# Altium PCB NEW_PCB.pcbdoc
Units mil, origin at the board's own origin, x right, y up, seen from the top; angles counter-clockwise.
Board outline 42633.03 x 29914.43 mil, 2 copper layers (Top Layer, Bottom Layer); 19 components, 4 nets, 160 pads, 0 vias.
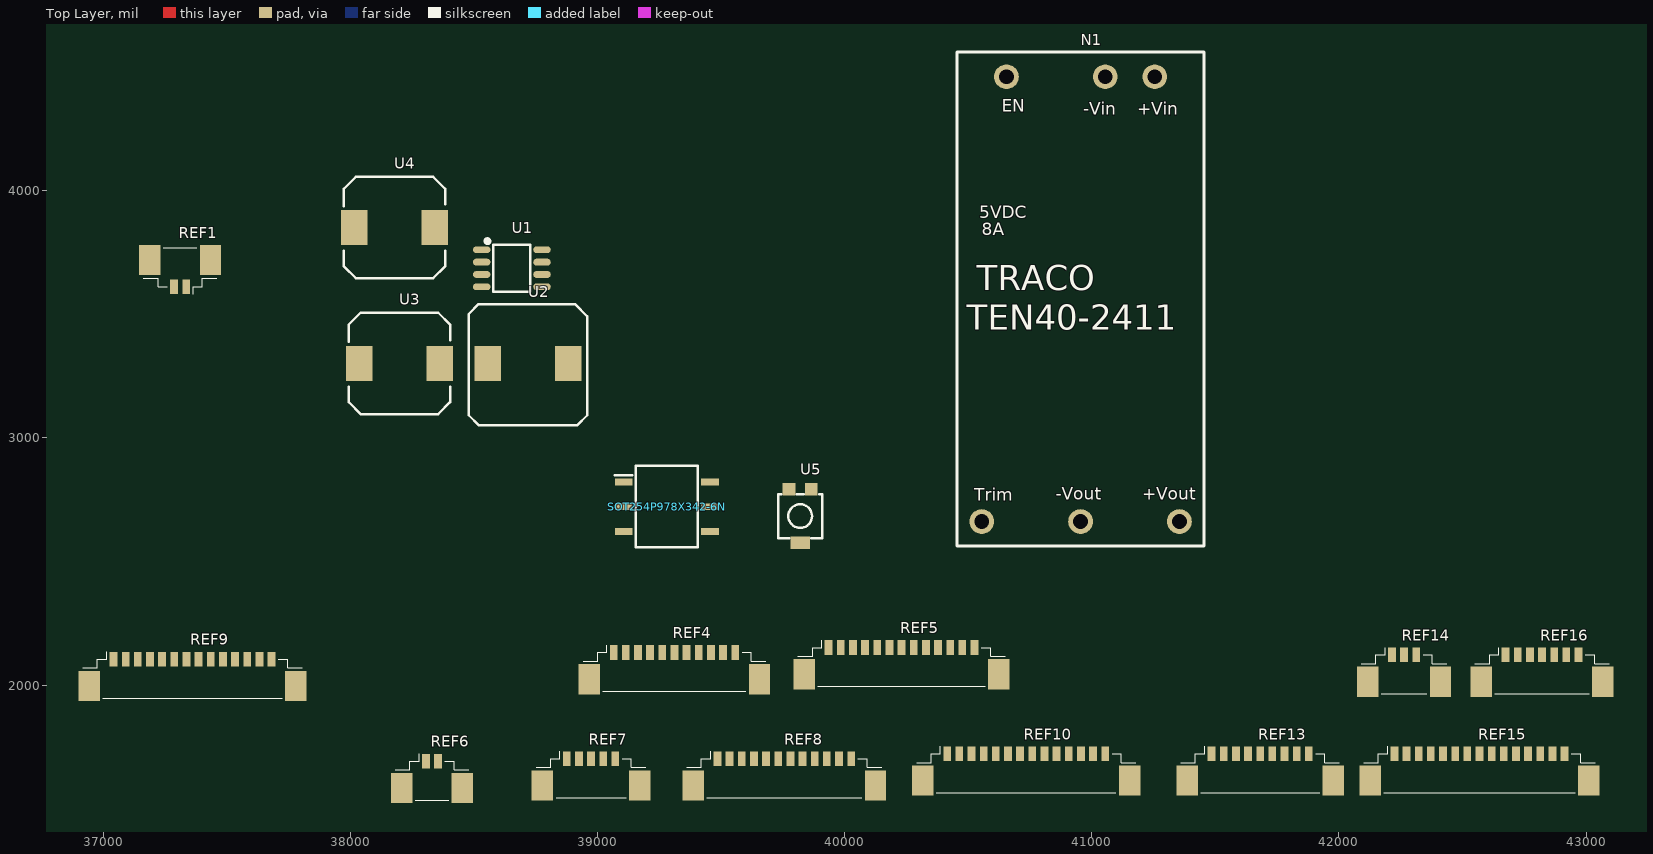
[diagram p0: Top Layer view]
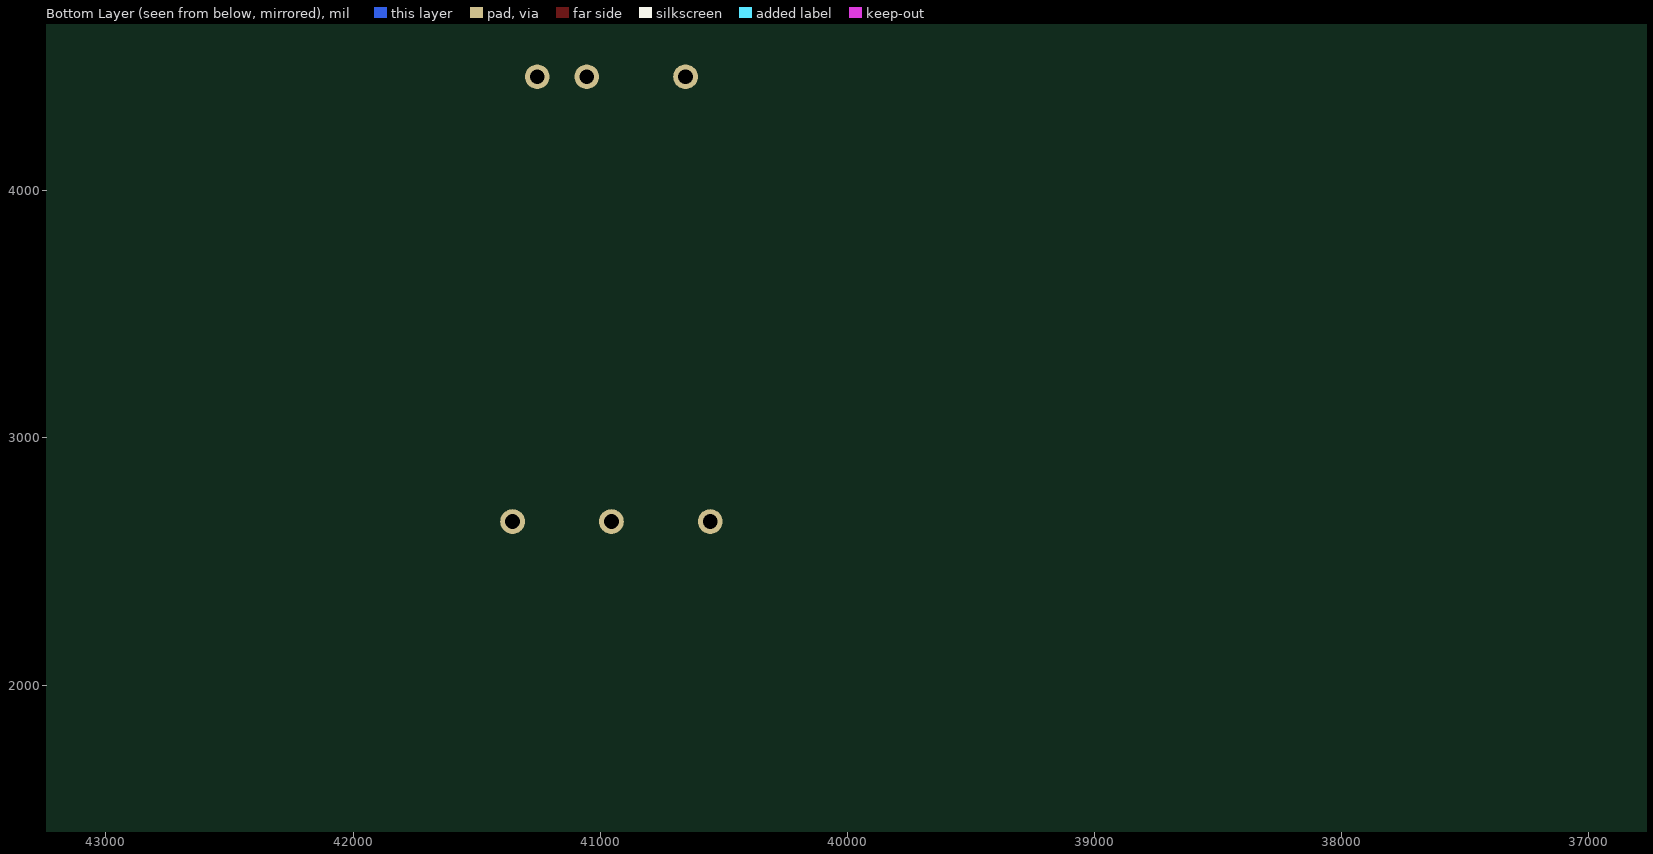
[diagram p1: Bottom Layer view, seen from below]

## Layer stack, top to bottom
Top Solder: solder mask 0.4, Solder Resist, Dk 3.5
Top Layer: signal copper 1.4
Dielectric1: dielectric 12.6, FR-4, Dk 4.8
Bottom Layer: signal copper 1.4
Bottom Solder: solder mask 0.4, Solder Resist, Dk 3.5

## Board outline
43633.03,1000 1000,1000 1000,30914.43 43633.03,30914.43

## Design rules (kind name [scope] priority, off if disabled: settings)
Clearance [All] p1: gap=10
PolygonConnect [All] p1: connectstyle=Relief reliefconductorwidth=10 reliefentries=4 polygonreliefangle="90 Angle" airgapwidth=10
RoutingVias [All] p1: holewidth=28 width=50 viastyle="Through Hole" minholewidth=28 minwidth=50 maxholewidth=28 maxwidth=50
SolderMaskExpansion [All] p1: expansion=4
Width [All] p1: maxlimit=10 minlimit=10 preferedwidth=10
29 further rules are at their usual default settings.

## Components (designator, comment, footprint, x,y, rotation, side; value= is the part's Value field where it differs from the comment)
N1 "TRACO TEN40" "TRACO TEN40" 40954.37,3561.93 r0 top
REF1 "53398-0271" 53398-0271 37334.37,3611.93 r0 top
REF4 "MOLEX_PICOBLADE_53398-1171_11X1.25MM_STRAIGHT" MOLEX_PICOBLADE_53398-1171_11X1.25MM_STRAIGHT 39064.37,2131.93 r0 top
REF5 "MOLEX_PICOBLADE_53398-1371_13X1.25MM_STRAIGHT" MOLEX_PICOBLADE_53398-1371_13X1.25MM_STRAIGHT 39934.37,2151.93 r0 top
REF6 "MOLEX_PICOBLADE_53398-0271_02X1.25MM_STRAIGHT" MOLEX_PICOBLADE_53398-0271_02X1.25MM_STRAIGHT 38304.37,1691.93 r0 top
REF7 "MOLEX_PICOBLADE_53398-0571_05X1.25MM_STRAIGHT" MOLEX_PICOBLADE_53398-0571_05X1.25MM_STRAIGHT 38874.37,1701.93 r0 top
REF8 "MOLEX_PICOBLADE_53398-1271_12X1.25MM_STRAIGHT" MOLEX_PICOBLADE_53398-1271_12X1.25MM_STRAIGHT 39484.37,1701.93 r0 top
REF9 "MOLEX_PICOBLADE_53398-1471_14X1.25MM_STRAIGHT" MOLEX_PICOBLADE_53398-1471_14X1.25MM_STRAIGHT 37040,2105 r0 top
REF10 "MOLEX_PICOBLADE_53398-1471_14X1.25MM_STRAIGHT" MOLEX_PICOBLADE_53398-1471_14X1.25MM_STRAIGHT 40414.37,1721.93 r0 top
REF13 "MOLEX_PICOBLADE_53398-0971_09X1.25MM_STRAIGHT" MOLEX_PICOBLADE_53398-0971_09X1.25MM_STRAIGHT 41484.37,1721.93 r0 top
REF14 "MOLEX_PICOBLADE_53398-0371_03X1.25MM_STRAIGHT" MOLEX_PICOBLADE_53398-0371_03X1.25MM_STRAIGHT 42214.37,2121.93 r0 top
REF15 "MOLEX_PICOBLADE_53398-1571_15X1.25MM_STRAIGHT" MOLEX_PICOBLADE_53398-1571_15X1.25MM_STRAIGHT 42224.37,1721.93 r0 top
REF16 "MOLEX_PICOBLADE_53398-0771_07X1.25MM_STRAIGHT" MOLEX_PICOBLADE_53398-0771_07X1.25MM_STRAIGHT 42674.37,2121.93 r0 top
SOT254P978X342-6N "SOT254P978X342-6N" SOT254P978X342-6N 35284.37,5721.93 r0 top
U1 "SOP-8_150MIL" SOP-8_150MIL 38754.37,3611.93 r0 top
U2 "B82464G4472M" B82464G4472M 38714.37,3301.93 r0 top
U3 "B82464" ? 38194.37,3301.93 r0 top
U4 "B82464" ? 38174.37,3851.93 r0 top
U5 "TRIMMER_3314G" TRIMMER_3314G 39824.37,2681.93 r0 top

## Footprints (in the part's own frame and the unit in brackets; to place one, negate y for a bottom-side part, rotate by r counter-clockwise, add the part's x,y. Pads: shape width x height; smd on the part's side, far side on the other; paste and mask are expansions set on the pad)
53398-0271 [mm]
  rect 0.8x1.5 smd: 1(0,0) 2(-1.25,0)
  rect 2.2x3.1 smd: 3(2.5,2.75) 4(-3.75,2.75)
  silkscreen extent -4.4,-0.75 3.15,4
B82464G4472M [mm]
  rect 2.7x3.6 smd: 1(-4.064,0) 2(4.236,-0.009)
  silkscreen extent -6.01,-6.35 6.18,6.1
MOLEX_PICOBLADE_53398-0271_02X1.25MM_STRAIGHT [mm]
  rect 0.8x1.5 smd: 1(0,0) 2(1.25,0)
  rect 2.2x3.1 smd: ""(-2.5,-2.75) ""(3.75,-2.75)
  silkscreen extent -3.15,-4 4.4,0.75
MOLEX_PICOBLADE_53398-0371_03X1.25MM_STRAIGHT [mm]
  rect 0.8x1.5 smd: 1(0,0) 2(1.25,0) 3(2.5,0)
  rect 2.2x3.1 smd: ""(-2.5,-2.75) ""(5,-2.75)
  silkscreen extent -3.15,-4 5.65,0.75
MOLEX_PICOBLADE_53398-0571_05X1.25MM_STRAIGHT [mm]
  rect 0.8x1.5 smd: 1(0,0) 2(1.25,0) 3(2.5,0) 4(3.75,0) 5(5,0)
  rect 2.2x3.1 smd: ""(-2.5,-2.75) ""(7.5,-2.75)
  silkscreen extent -3.15,-4 8.15,0.75
MOLEX_PICOBLADE_53398-0771_07X1.25MM_STRAIGHT [mm]
  rect 0.8x1.5 smd: 1(0,0) 2(1.25,0) 3(2.5,0) 4(3.75,0) 5(5,0) 6(6.25,0) 7(7.5,0)
  rect 2.2x3.1 smd: ""(-2.5,-2.75) ""(10,-2.75)
  silkscreen extent -3.15,-4 10.65,0.75
MOLEX_PICOBLADE_53398-0971_09X1.25MM_STRAIGHT [mm]
  rect 0.8x1.5 smd: 1(0,0) 2(1.25,0) 3(2.5,0) 4(3.75,0) 5(5,0) 6(6.25,0) 7(7.5,0) 8(8.75,0) 9(10,0)
  rect 2.2x3.1 smd: ""(-2.5,-2.75) ""(12.5,-2.75)
  silkscreen extent -3.15,-4 13.15,0.75
MOLEX_PICOBLADE_53398-1171_11X1.25MM_STRAIGHT [mm]
  rect 0.8x1.5 smd: 1(0,0) 2(1.25,0) 3(2.5,0) 4(3.75,0) 5(5,0) 6(6.25,0) 7(7.5,0) 8(8.75,0) 9(10,0) 10(11.25,0) 11(12.5,0)
  rect 2.2x3.1 smd: ""(-2.5,-2.75) ""(15,-2.75)
  silkscreen extent -3.15,-4 15.65,0.75
MOLEX_PICOBLADE_53398-1271_12X1.25MM_STRAIGHT [mm]
  rect 0.8x1.5 smd: 1(0,0) 2(1.25,0) 3(2.5,0) 4(3.75,0) 5(5,0) 6(6.25,0) 7(7.5,0) 8(8.75,0) 9(10,0) 10(11.25,0) 11(12.5,0) 12(13.75,0)
  rect 2.2x3.1 smd: ""(-2.5,-2.75) ""(16.25,-2.75)
  silkscreen extent -3.15,-4 16.9,0.75
MOLEX_PICOBLADE_53398-1371_13X1.25MM_STRAIGHT [mm]
  rect 0.8x1.5 smd: 1(0,0) 2(1.25,0) 3(2.5,0) 4(3.75,0) 5(5,0) 6(6.25,0) 7(7.5,0) 8(8.75,0) 9(10,0) 10(11.25,0) 11(12.5,0) 12(13.75,0) 13(15,0)
  rect 2.2x3.1 smd: ""(-2.5,-2.75) ""(17.5,-2.75)
  silkscreen extent -3.15,-4 18.15,0.75
MOLEX_PICOBLADE_53398-1471_14X1.25MM_STRAIGHT [mm]
  rect 0.8x1.5 smd: 1(0,0) 2(1.25,0) 3(2.5,0) 4(3.75,0) 5(5,0) 6(6.25,0) 7(7.5,0) 8(8.75,0) 9(10,0) 10(11.25,0) 11(12.5,0) 12(13.75,0) 13(15,0) 14(16.25,0)
  rect 2.2x3.1 smd: ""(-2.5,-2.75) ""(18.75,-2.75)
  silkscreen extent -3.15,-4 19.4,0.75
MOLEX_PICOBLADE_53398-1571_15X1.25MM_STRAIGHT [mm]
  rect 0.8x1.5 smd: 1(0,0) 2(1.25,0) 3(2.5,0) 4(3.75,0) 5(5,0) 6(6.25,0) 7(7.5,0) 8(8.75,0) 9(10,0) 10(11.25,0) 11(12.5,0) 12(13.75,0) 13(15,0) 14(16.25,0) 15(17.5,0)
  rect 2.2x3.1 smd: ""(-2.5,-2.75) ""(20,-2.75)
  silkscreen extent -3.15,-4 20.65,0.75
SOP-8_150MIL [mm]
  oval 1.8x0.7 smd: 1(-5.69,3.81) 2(-5.69,2.54) 3(-5.69,1.27) 4(-5.69,0) 5(0.508,0) 6(0.508,1.27) 7(0.508,2.54) 8(0.508,3.81)
  silkscreen extent -5.3,-0.5 -0.69,4.9
SOT254P978X342-6N [mil]
  rect 70.9x27.6 smd: 1(3820,-2900) 2(3820,-3000) 3(3820,-3100) 4(4170,-3100) 5(4170,-3000) 6(4170,-2900)
  silkscreen extent 3784,-3165 4121,-2835
"TRACO TEN40" [mil]
  round 100 hole 60: 1(300,900) 2(100,900) 3(-300,900) 4(400,-900) 5(0,-900) 6(-400,-900)
  silkscreen extent -500,-1000 500,1000
TRIMMER_3314G [mil]
  rect 51.2x51.2 smd: 1(-50,110) 3(40,110)
  rect 78.7x51.2 smd: 2(-5,-106)
  silkscreen extent -94,-87 84,91
? [mil]
  rect 106.3x141.7 smd: 1(-160,0) 2(166,0)
  silkscreen extent -202,-205 208,205

## Nets (pads, with @x,y where several pads share a name; then routed paths per layer and width w, separated by ;. In a path a pad name is that pad's centre, name@x,y a point inside that pad or via, vN(x,y) a via of type N, cw(c..) or ccw(c..) an arc to the next point about the centre after c; other vN are vias at no path point)
S$13: 
S$15: 
S$18: 
SOT254P978X342-6N: 
pads on no net: N1.1 N1.2 N1.3 N1.4 N1.5 N1.6 REF1.1 REF1.2 REF1.3 REF1.4 REF4. REF4.1 REF4.2 REF4.3 REF4.4 REF4.5 REF4.6 REF4.7 REF4.8 REF4.9 REF4.10 REF4.11 REF5. REF5.1 REF5.2 REF5.3 REF5.4 REF5.5 REF5.6 REF5.7 REF5.8 REF5.9 REF5.10 REF5.11 REF5.12 REF5.13 REF6. REF6.1 REF6.2 REF7. REF7.1 REF7.2 REF7.3 REF7.4 REF7.5 REF8. REF8.1 REF8.2 REF8.3 REF8.4 REF8.5 REF8.6 REF8.7 REF8.8 REF8.9 REF8.10 REF8.11 REF8.12 REF9. REF9.1 REF9.2 REF9.3 REF9.4 REF9.5 REF9.6 REF9.7 REF9.8 REF9.9 REF9.10 REF9.11 REF9.12 REF9.13 REF9.14 REF10. REF10.1 REF10.2 REF10.3 REF10.4 REF10.5 REF10.6 REF10.7 REF10.8 REF10.9 REF10.10 REF10.11 REF10.12 REF10.13 REF10.14 REF13. REF13.1 REF13.2 REF13.3 REF13.4 REF13.5 REF13.6 REF13.7 REF13.8 REF13.9 REF14. REF14.1 REF14.2 REF14.3 REF15. REF15.1 REF15.2 REF15.3 REF15.4 REF15.5 REF15.6 REF15.7 REF15.8 REF15.9 REF15.10 REF15.11 REF15.12 REF15.13 REF15.14 REF15.15 REF16. REF16.1 REF16.2 REF16.3 REF16.4 REF16.5 REF16.6 REF16.7 SOT254P978X342-6N.1 SOT254P978X342-6N.2 SOT254P978X342-6N.3 SOT254P978X342-6N.4 SOT254P978X342-6N.5 SOT254P978X342-6N.6 U1.1 U1.2 U1.3 U1.4 U1.5 U1.6 U1.7 U1.8 U2.1 U2.2 U3.1 U3.2 U4.1 U4.2 U5.1 U5.2 U5.3

## Text inside footprints (layer, text, board x,y; h text height)
N1: Top Overlay "EN" at 40634.37,4319.63 h50; Top Overlay "8A" at 40554.37,3819.63 h50; Top Overlay "5VDC" at 40544.37,3889.63 h50; Top Overlay "TEN40-2411" at 40494.37,3437.43 h100; Top Overlay "TRACO" at 40534.37,3597.43 h100; Top Overlay "-Vout" at 40854.37,2749.63 h50; Top Overlay "+Vout" at 41204.37,2749.63 h50; Top Overlay "-Vin" at 40964.37,4307.43 h50; Top Overlay "+Vin" at 41184.37,4307.43 h50; Top Overlay "Trim" at 40524.37,2746.93 h50
REF4: Document "REF" at 39263.19,1999.05 h39.37
REF5: Document "REF" at 40182.4,2019.05 h39.37
REF6: Document "REF" at 38281.73,1559.05 h39.37
REF7: Document "REF" at 38925.55,1569.05 h39.37
REF8: Document "REF" at 39707.8,1569.05 h39.37
REF9: Document "REF" at 37312.64,1972.12 h39.37
REF10: Document "REF" at 40687.01,1589.05 h39.37
REF13: Document "REF" at 41633.98,1589.05 h39.37
REF14: Document "REF" at 42216.34,1989.05 h39.37
REF15: Document "REF" at 42521.61,1589.05 h39.37
REF16: Document "REF" at 42774.76,1989.05 h39.37